# Altium PCB fraction layer.PcbDoc
Units mm, origin at the board's own origin, x right, y up, seen from the top; angles counter-clockwise.
Board outline 152.4 x 101.6 mm, 2 copper layers (Top Layer, Bottom Layer); 11 components, 25 nets, 100 pads, 0 vias.
Unrouted connection lines stored in the file: 54.
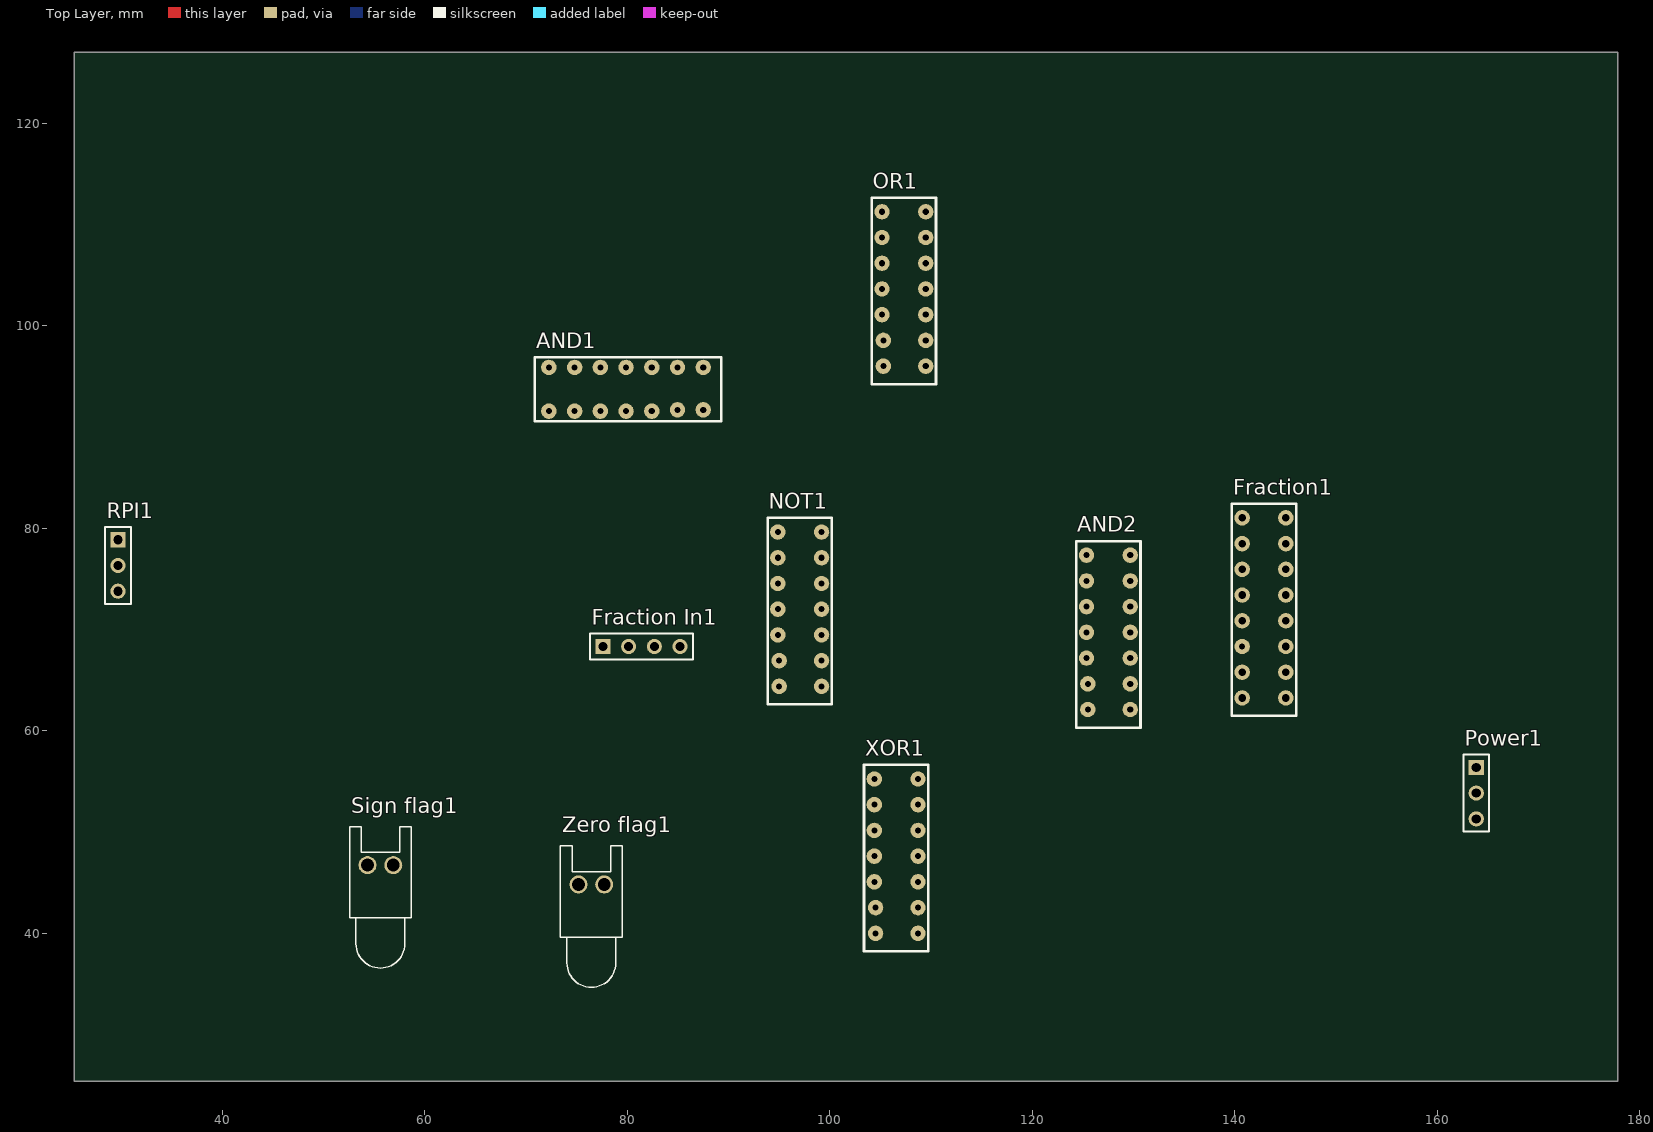
[diagram p0: Top Layer view]
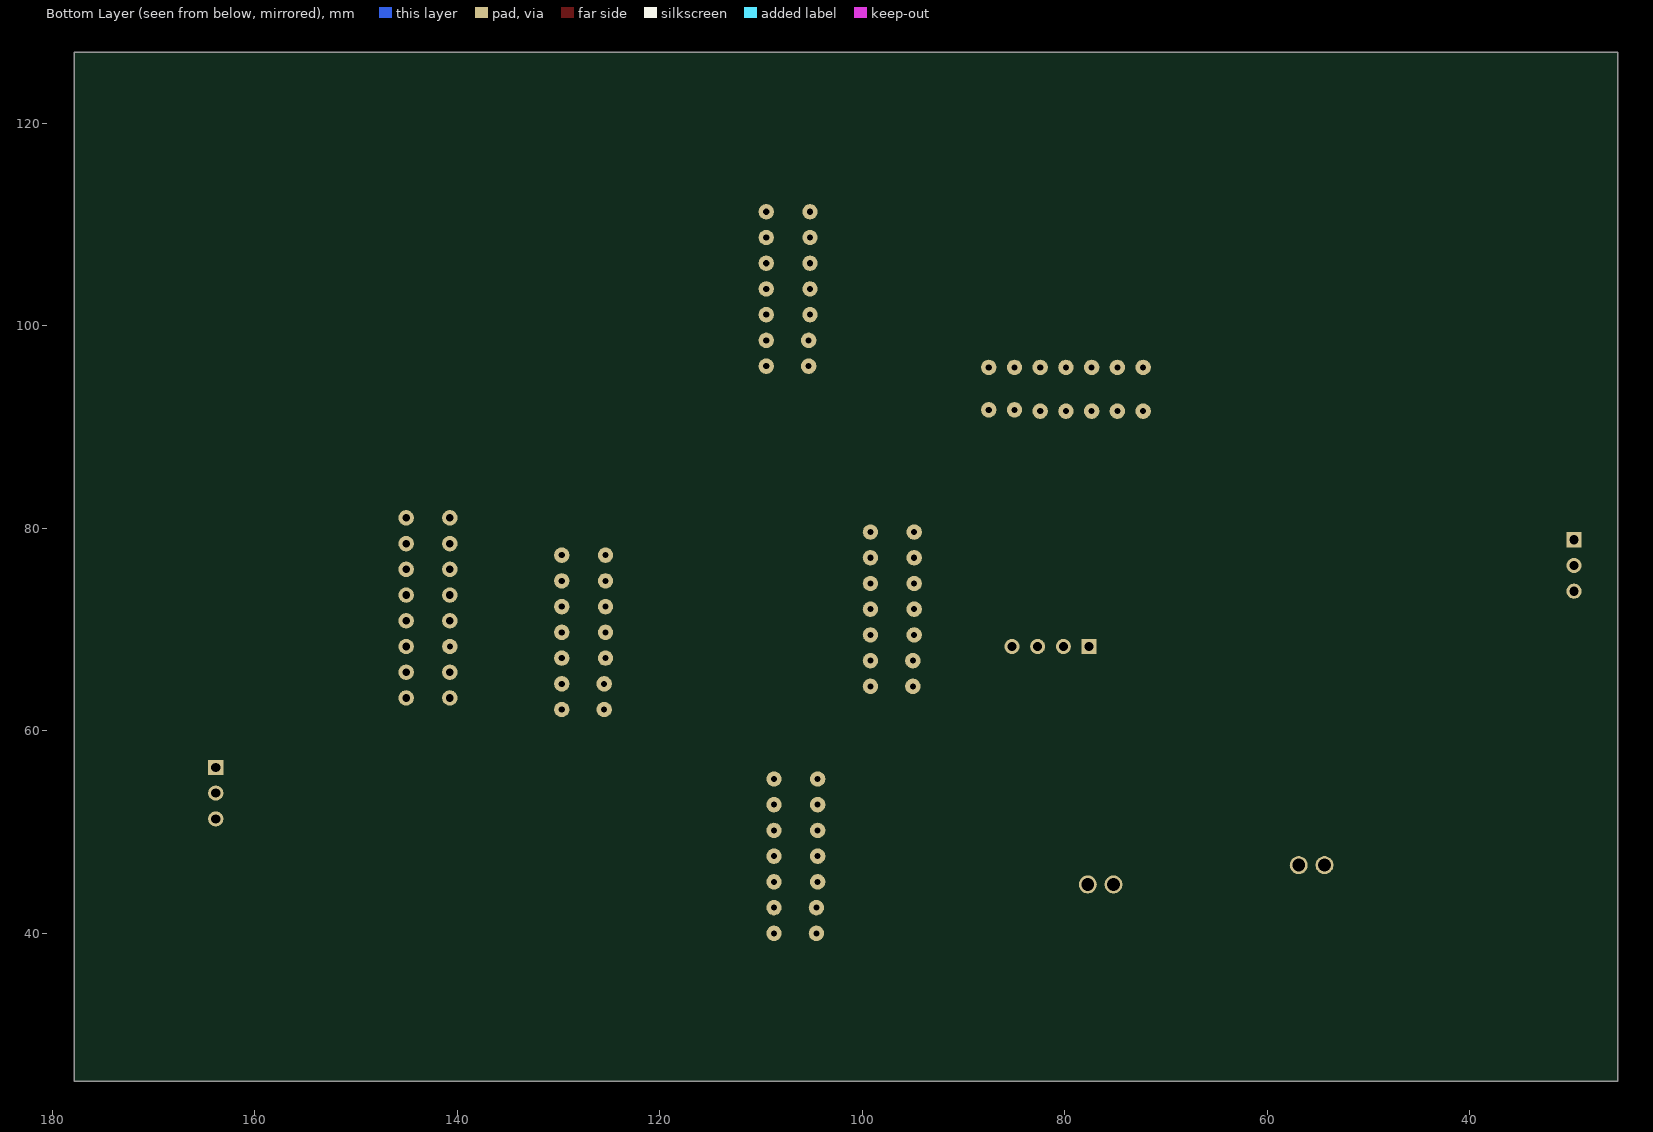
[diagram p1: Bottom Layer view, seen from below]

## Layer stack, top to bottom
Top Solder: solder mask 0.0102, Solder Resist, Dk 3.5
Top Layer: signal copper 0.0356
Dielectric 1: dielectric 0.32, FR-4, Dk 4.8
Bottom Layer: signal copper 0.0356
Bottom Solder: solder mask 0.0102, Solder Resist, Dk 3.5

## Board outline
25.4,25.4 177.8,25.4 177.8,127 25.4,127

## Design rules (kind name [scope] priority, off if disabled: settings)
Clearance [All] p1: gap=0.5 ignorepadtopadclearanceinfootprint=FALSE except(0: Arc-Hole Track-Hole SMDPad-Hole THPad-Hole Via-Hole Fill-Hole Poly-Hole Region-Hole Text-Hole; 0.25: THPad-Text Fill-Text Poly-Text Region-Text; 0.254: Arc-SMDPad Arc-THPad Arc-Via Arc-Text Track-SMDPad Track-THPad Track-Via Track-Text SMDPad-SMDPad SMDPad-THPad SMDPad-Via SMDPad-Text THPad-THPad THPad-Via Via-Via Via-Text Text-Text)
ComponentClearance [All] p1: gap=0.254 collisioncheckmode=3 verticalgap=0 showdistances=FALSE
PolygonConnect [All] p1: connectstyle=Relief reliefconductorwidth=0.254 reliefentries=4 polygonreliefangle="90 Angle" airgapwidth=0.254
RoutingLayers [All] p1: top layer_v5=TRUE bottom layer_v5=FALSE
RoutingPriority [All] p1: routingpriority=5
RoutingVias [All] p1: holewidth=0.711 width=1.27 viastyle="Through Hole" minholewidth=0.711 minwidth=1.27 maxholewidth=0.711 maxwidth=1.27
ShortCircuit [All] p1: allowed=TRUE
SolderMaskExpansion [All] p1: expansion=0.102
UnRoutedNet [All] p1: checkbadconnections=TRUE
Width [All] p1: maxlimit=0.254 minlimit=0.254 preferedwidth=0.254
25 further rules are at their usual default settings.

## Components (designator, comment, footprint, x,y, rotation, side; value= is the part's Value field where it differs from the comment)
AND1 "Component_1" Gate? 72.771,93.345 r90 top
AND2 "Component_1" Gate? 127.127,76.835 r0 top
Fraction1 "Component_1" 7483 142.494,77.978 r0 top
"Fraction In1" "Header 4" HDR1X4 77.597,68.326 r0 top
NOT1 "Component_1" Gate? 96.647,79.121 r0 top
OR1 "Component_1" Gate? 106.934,110.744 r0 top
Power1 "Header 3" HDR1X3 163.83,56.388 r270 top
RPI1 "Header 3" HDR1X3 29.718,78.867 r270 top
"Sign flag1" "LED0" LED-0 55.626,46.736 r0 top
XOR1 "Component_1" Gate? 106.172,54.737 r0 top
"Zero flag1" "LED0" LED-0 76.454,44.831 r0 top

## Footprints (in the part's own frame and the unit in brackets; to place one, negate y for a bottom-side part, rotate by r counter-clockwise, add the part's x,y. Pads: shape width x height; smd on the part's side, far side on the other; paste and mask are expansions set on the pad)
7483 [mil]
  round 60 hole 30: A1(100,-480) A2(-70,-580) A3(-70,-80) A4(-70,120) B1(100,-380) B2(-70,-480) B3(-70,-180) B4(100,120) C0(100,-180) C1(100,-580) C3(-70,20) C4(100,20) C5(100,-80) GND(100,-280) Vcc(-70,-280)
  round 60 hole 23.62: C2(-70,-380)
  silkscreen extent -110,-650 140,175
Gate? [mil]
  round 60 hole 23.62: 1(-70,20) 2(-70,-80) 3(-70,-180) 4(-70,-280) 5(-70,-380) 6(-65,-480) 7(-65,-580) 8(100,-580) 9(100,-480) 10(100,-380) 11(100,-280) 12(100,-180) 13(100,-80) 14(100,20)
  silkscreen extent -110,-650 140,75
HDR1X3 [mm] "Connector; Header; 3 Position"
  rect 1.5x1.5 hole 0.9: 1(0,0)
  round 1.5 hole 0.9: 2(2.54,0) 3(5.08,0)
  silkscreen extent -1.27,-1.27 6.35,1.27
HDR1X4 [mm] "Connector; Header; 4 Position"
  rect 1.5x1.5 hole 0.9: 1(0,0)
  round 1.5 hole 0.9: 2(2.54,0) 3(5.08,0) 4(7.62,0)
  silkscreen extent -1.27,-1.27 8.89,1.27
LED-0 [mil] "LED; 2 Leads"
  round 70 hole 50: 1(50,0) 2(-50,0)
  silkscreen extent -120,-400 120,150

## Part data
"Fraction In1": "Header, 4-Pin", LatestRevisionDate=17-Jul-2002, LatestRevisionNote="Re-released for DXP Platform.", Publisher="Altium Limited"
Power1 RPI1: "Header, 3-Pin", LatestRevisionDate=17-Jul-2002, LatestRevisionNote="Re-released for DXP Platform.", Publisher="Altium Limited"
"Sign flag1" "Zero flag1": "Typical INFRARED GaAs LED", LatestRevisionDate=08-Jul-2005, LatestRevisionNote="Mech Layer 1 removed.", PackageDescription="LED; 2 Leads", PackageReference=LED-0, Published=8-Jun-2000, Publisher="Altium Limited"

## Nets (pads, with @x,y where several pads share a name; then routed paths per layer and width w, separated by ;. In a path a pad name is that pad's centre, name@x,y a point inside that pad or via, vN(x,y) a via of type N, cw(c..) or ccw(c..) an arc to the next point about the centre after c; other vN are vias at no path point)
2: Fraction1.C3 OR1.3
3: Fraction1.A4 OR1.11
CF0: "Fraction In1.2" AND2.1 AND2.4 NOT1.1 XOR1.1
CF0&~CF1: AND1.10 AND2.6 OR1.2
CF0&~CF1&CF2: AND1.8 OR1.12
CF0^CF2: AND1.5 NOT1.13 XOR1.3
CF1: "Fraction In1.3" AND1.1 AND2.2 AND2.9 NOT1.3
CF1&~(CF0^CF2): AND1.3 OR1.9
CF2: "Fraction In1.4" AND1.9 AND1.13 NOT1.5 XOR1.2
GND: "Sign flag1.2" "Zero flag1.2" AND1.7 AND2.7 Fraction1.A2 NOT1.7 OR1.7 Power1.2 RPI1.3 XOR1.7
OutLSB: Fraction1.B2 OR1.8
OutMSB: AND2.3 Fraction1.C2
"RPI Switch": Fraction1.Vcc RPI1.2
Sign: "Sign flag1.1" Power1.3
Vcc: AND1.14 AND2.14 Fraction1.A3 Fraction1.B3 Fraction1.B4 NOT1.14 OR1.14 Power1.1 RPI1.1 XOR1.14
"Zero flag": "Zero flag1.1" NOT1.10
~(CF0^CF2): AND1.2 NOT1.12
~CF0: AND2.10 NOT1.2
~CF0&CF1: AND1.12 AND2.8 AND2.13
~CF0&CF1&CF2: AND1.11 OR1.1
~CF0&CF1&~CF2: AND2.11 OR1.13
~CF1: AND1.4 AND2.5 NOT1.4
~CF1&(CF0^CF2): AND1.6 OR1.10
~CF2: AND2.12 NOT1.6
"~Zero flag": "Fraction In1.1" NOT1.11
pads on no net: Fraction1.A1 Fraction1.B1 Fraction1.C0 Fraction1.C1 Fraction1.C4 Fraction1.C5 Fraction1.GND NOT1.8 NOT1.9 OR1.4 OR1.5 OR1.6 XOR1.4 XOR1.5 XOR1.6 XOR1.8 XOR1.9 XOR1.10 XOR1.11 XOR1.12 XOR1.13